# EAGLE board TopBoardLidar (EAGLE 9.4.2)

Size 160 x 100 mm. Coordinates in mm from the lower left corner, seen from the top.
Outline: 0,0 160,0 160,100 0,100 0,0
Copper layers (1*16): Top 0.035mm / dielectric 1.5mm / Bottom 0.035mm
Design rules "default": minimum track width 6mil, minimum drill 0.35mm, track to track 6mil, track to pad 6mil, pad to pad 6mil, via to via 6mil, smd to smd 6mil, copper to edge 40mil, drill to drill 6mil, minimum pad ring 10mil, minimum via ring 8mil, stop-mask expansion 4mil, vias tented up to drill 0mil, thermal gap 10mil

## Footprints (pad centres in the part's own frame; a part is rotated, then mirrored left to right if it is on the bottom)
0603 = smd 1.1 x 1: 1 -0.85,0; 2 0.85,0
LED-0603 = smd 1 x 1: A -0.877,0; C 0.877,0
SMT-JUMPER_3_2-NC_TRACE_SILK = smd 0.635 x 1.27: 1 -1.016,0; 2 0,0; 3 1.016,0
1X01_NO_SILK = drill 1.016 pad 1.88: 1 0,0
1X04_1MM_RA = smd 0.6 x 1.35: 1 -1.5,0; 2 -0.5,0; 3 0.5,0; 4 1.5,0 | smd 1.2 x 2: NC1 2.8,-3.675; NC2 -2.8,-3.675
1X04_NO_SILK = drill 1.016 pad 1.88: 1 0,0; 2 2.54,0; 3 5.08,0; 4 7.62,0
PAD-JUMPER-2-NC_BY_TRACE_YES_SILK = smd 0.635 x 1.27: 1 -0.508,0; 2 0.508,0
VL53L1X = smd 0.5 x 0.9: 1 1.6,-1; 2 0.8,-1; 3 0,-1; 4 -0.8,-1; 5 -1.6,-1; 7 -1.6,1; 8 -0.8,1; 9 0,1; 10 0.8,1; 11 1.6,1 | smd 1.4 x 0.5: 6 -2.05,0; 12 2.05,0

## Placement (x,y rotation side)
C1  4.7uF  [0603]  -17.78,13.97 0 top  (outside the outline)
C4  0.1uF  [0603]  -21.59,13.97 0 top  (outside the outline)
D1  RED  [LED-0603]  -21.59,21.59 0 top  (outside the outline)
I2C1  [SMT-JUMPER_3_2-NC_TRACE_SILK]  -26.67,17.78 0 top  (outside the outline)
J1  [1X01_NO_SILK]  -13.97,21.59 0 top  (outside the outline)
J2  SMD  [1X04_1MM_RA]  -16.51,5.08 0 top  (outside the outline)
J3  PTH  [1X04_NO_SILK]  -29.21,8.89 0 top  (outside the outline)
J4  SMD  [1X04_1MM_RA]  -24.13,5.08 0 top  (outside the outline)
J5  [1X01_NO_SILK]  -17.78,21.59 0 top  (outside the outline)
JP1  INT  [PAD-JUMPER-2-NC_BY_TRACE_YES_SILK]  -13.97,13.97 0 top  (outside the outline)
R3  1k  [0603]  -25.4,13.97 0 top  (outside the outline)
R6  2.2k  [0603]  -29.21,13.97 0 top  (outside the outline)
R7  2.2k  [0603]  -15.24,17.78 0 top  (outside the outline)
R8  10k  [0603]  -19.05,17.78 0 top  (outside the outline)
R9  10k  [0603]  -22.86,17.78 0 top  (outside the outline)
U1  VL53L1XSMD  [VL53L1X]  -16.51,8.89 0 top  (outside the outline)

## Library data of the parts
C1 = SparkFun-Capacitors; PROD_ID: CAP-08280
C4 = SparkFun-Capacitors; PROD_ID: CAP-00810
D1 = SparkFun-LED; PROD_ID: DIO-00819
I2C1 = SparkFun-Jumpers
J1 J5 = SparkFun-Connectors
J2-J4 = SparkX
JP1 = SparkFun-Passives
R3 = SparkFun-Resistors; PROD_ID: RES-07856
R6 R7 = SparkFun-Resistors; PROD_ID: RES-08272
R8 R9 = SparkFun-Resistors; PROD_ID: RES-00824
U1 = vl53l1x

## Nets
3.3V: C1.1 C4.1 I2C1.2 J2.2 J3.2 J4.2 JP1.2 R3.2 R9.2 U1.1 U1.11
!INT: J5.1 R8.1 U1.7
!SHUT: J1.1 R9.1 U1.5
GND: C1.2 C4.2 D1.C J2.1 J3.1 J4.1 U1.2 U1.3 U1.4 U1.6 U1.12
N$3: D1.A R3.1
N$5: I2C1.1 R7.2
N$6: I2C1.3 R6.2
N$7: JP1.1 R8.2
SCL: J2.4 J3.4 J4.4 R7.1 U1.10
SDA: J2.3 J3.3 J4.3 R6.1 U1.9

## Tracks (layer width: path | path; a pad name or v marks a point on that pad's centre or on a via)
3.3V  (10 unrouted)
!INT  (2 unrouted)
!SHUT  (2 unrouted)
GND  (10 unrouted)
N$3  (1 unrouted)
N$5  (1 unrouted)
N$6  (1 unrouted)
N$7  (1 unrouted)
SCL  (4 unrouted)
SDA  (4 unrouted)